# Altium PCB PCB_FVT_TESTER_2LAYERS.PcbDoc
Units mil, origin at the board's own origin, x right, y up, seen from the top; angles counter-clockwise.
Board outline 4400 x 2300 mil, 2 copper layers (Top Layer, Bottom Layer); 53 components, 42 nets, 165 pads, 1 vias.
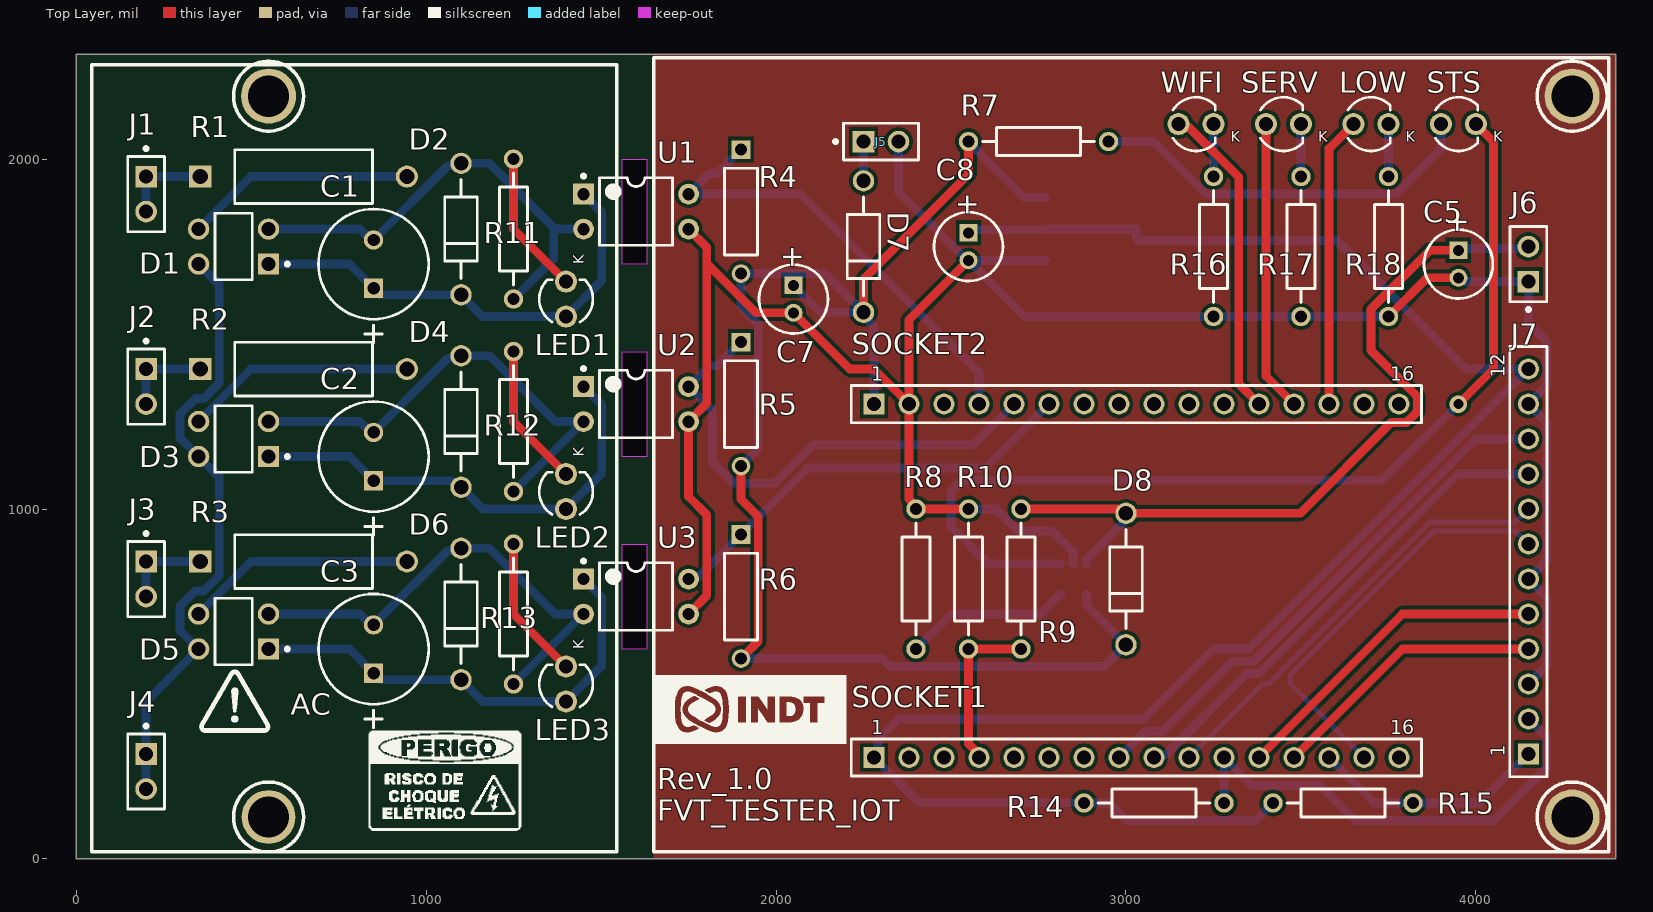
[diagram p0: Top Layer view]
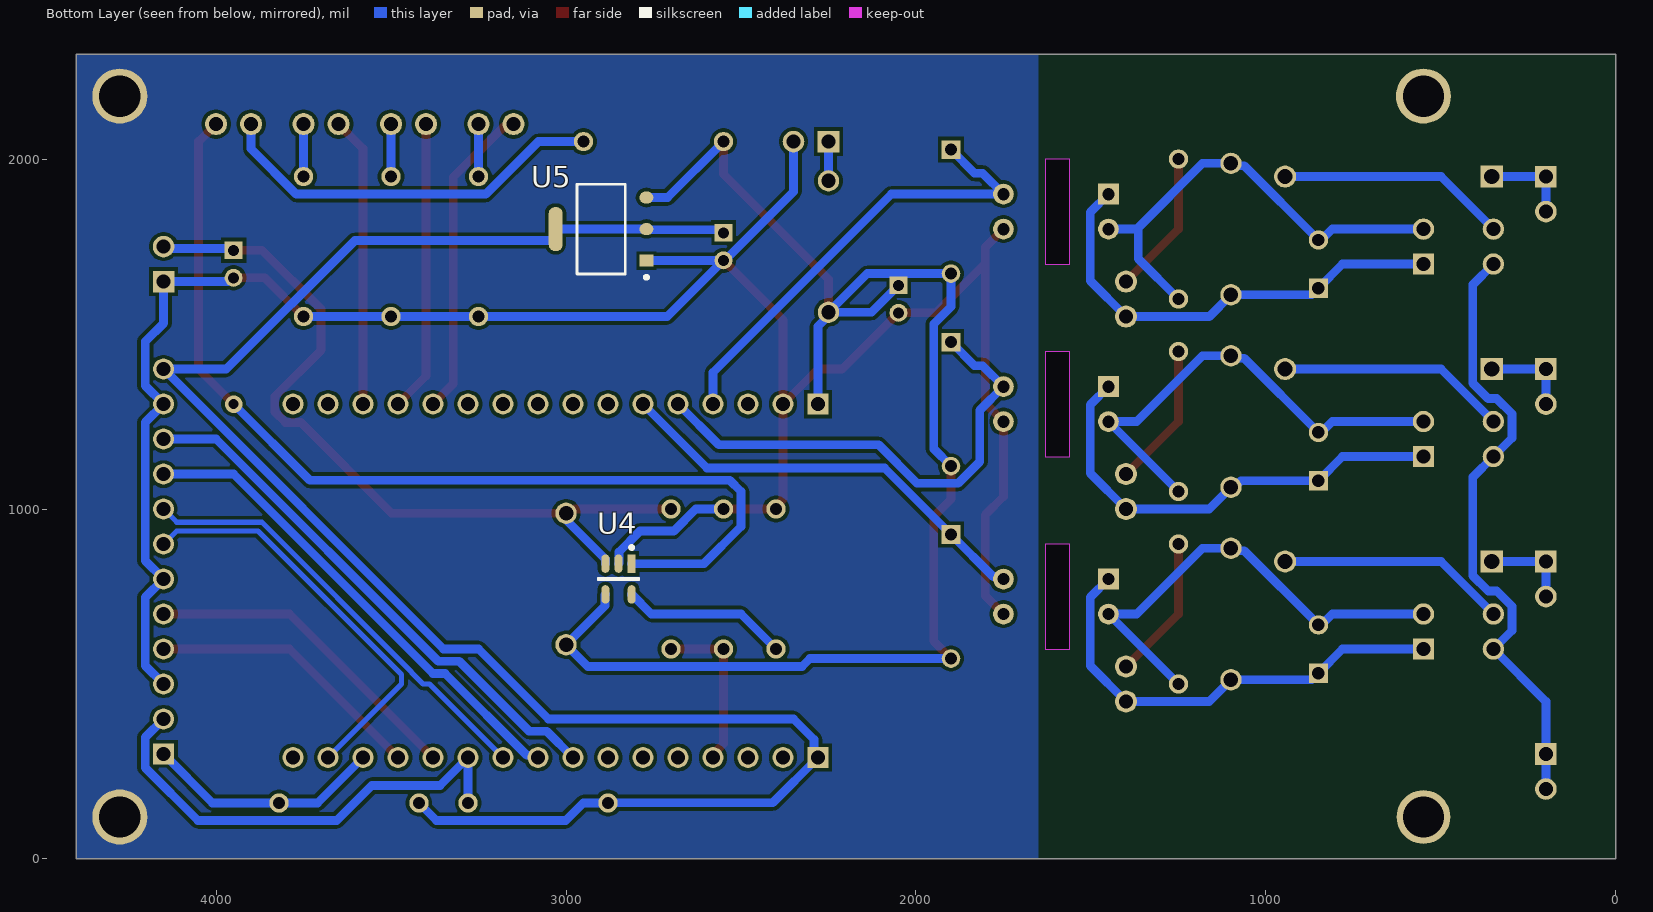
[diagram p1: Bottom Layer view, seen from below]

## Layer stack, top to bottom
Top Solder: solder mask 0.4, Solder Resist, Dk 3.5
Top Layer: signal copper 1.4
Dielectric 1: dielectric 12.6, FR-4, Dk 4.8
Bottom Layer: signal copper 1.4
Bottom Solder: solder mask 0.4, Solder Resist, Dk 3.5

## Board outline
0,0 0,2300 4400,2300 4400,0
cut-out: 1560,600 1560,900 1630,900 1630,600
cut-out: 1560,1150 1560,1450 1630,1450 1630,1150
cut-out: 1560,1700 1560,2000 1630,2000 1630,1700

## Design rules (kind name [scope] priority, off if disabled: settings)
Clearance [All] p1: gap=10 ignorepadtopadclearanceinfootprint=TRUE except(0: Text-Text; 6: Poly-Text Region-Text; 7: Arc-Text THPad-Text)
DiffPairsRouting [All] p1: maxlimit=10 minlimit=10 mostfreqgap=10 toplayer_minwidth=15 toplayer_maxwidth=15 toplayer_prefwidth=15 bottomlayer_minwidth=15 bottomlayer_maxwidth=15 bottomlayer_prefwidth=15 maxuncoupledlength=500
HoleSize [All] p1: absolutevalues=TRUE maxlimit=157.48 minlimit=0.98 maxpercent=80.000 minpercent=20.000
PolygonConnect [All] p1: connectstyle=Relief reliefconductorwidth=10 reliefentries=4 polygonreliefangle="90 Angle" airgapwidth=10
RoutingVias [All] p1: holewidth=28 width=50 viastyle="Through Hole" minholewidth=28 minwidth=50 maxholewidth=28 maxwidth=50
SilkToSilkClearance SilkToSilkClearance_noRules [All] p1: silktosilkclearance=0
SilkToSilkClearance [All] p2: silktosilkclearance=10
SilkToSolderMaskClearance SilkToSolderMaskClearance_INDT [IsPad] p1: minsilkscreentomaskgap=4 clearancetoexposedcopper=TRUE
SilkToSolderMaskClearance [IsPad] p2: minsilkscreentomaskgap=10 clearancetoexposedcopper=TRUE
SolderMaskExpansion [All] p1: expansion=4
UnRoutedNet [All] p1: checkbadconnections=TRUE
Width [All] p1: maxlimit=35 minlimit=15 preferedwidth=25 minimp=50.000000 maximp=50.000000 favimp=50.000000
25 further rules are at their usual default settings.

## Classes and differential pairs
component class soqueteESP32: J7 LOW R14 R15 R16 R17 R18 SERV SOCKET1 WIFI
component class "Modulo de isolaзгo AC": C1 C2 C3 D1 D2 D3 D4 D5 D6 J1 J2 J3 J4 LED1 LED2 LED3 R1 R2 R3 R4 R5 R6 R11 R12 R13 U1 U2 U3
component class AdaptadorBateria: C5 C7 C8 D7 D8 J5 J6 R7 R8 R9 R10 STS U4 U5
differential pair NET: +NET_P -NET_N

## Components (designator, comment, footprint, x,y, rotation, side; value= is the part's Value field where it differs from the comment)
C1 "ECA1HM101" CAPPR65-350-1150X800X1250 850,1700 r90 top
C2 "ECA1HM101" CAPPR65-350-1150X800X1250 850,1150 r90 top
C3 "ECA1HM101" CAPPR65-350-1150X800X1250 850,600 r90 top
C5 "ECA1HM220" CAPPR55-200-1100X500X1200 3950,1700 r270 top
C7 "ECA1HM220" CAPPR55-200-1100X500X1200 2050,1600 r270 top
C8 "ECA1HM220" CAPPR55-200-1100X500X1200 2550,1750 r270 top
D1 "MB6M-E3/45" FP-MB6M-E3-45-MFG 450,1750 r180 top
D2 "1N5919BG" ONSC-AXIAL_LEAD-2-59-10_P 1100,1800 r90 top
D3 "MB6M-E3/45" FP-MB6M-E3-45-MFG 450,1200 r180 top
D4 "1N5919BG" ONSC-AXIAL_LEAD-2-59-10_P 1100,1250 r90 top
D5 "MB6M-E3/45" FP-MB6M-E3-45-MFG 450,650 r180 top
D6 "1N5919BG" ONSC-AXIAL_LEAD-2-59-10_P 1100,700 r90 top
D7 "1N5819RLG" ONSC-AXIAL_LEAD-2-59-10_P 2250,1750 r90 top
D8 "1N5819RLG" ONSC-AXIAL_LEAD-2-59-10_P 3000,800 r90 top
J1 "TSW-102-07-G-S" FP-TSW-102-07-G-S-MFG 200,1900 r270 top
J2 "TSW-102-07-G-S" FP-TSW-102-07-G-S-MFG 200,1350 r270 top
J3 "TSW-102-07-G-S" FP-TSW-102-07-G-S-MFG 200,800 r270 top
J4 "TSW-102-07-G-S" FP-TSW-102-07-G-S-MFG 200,250 r270 top
J5 "TSW-102-07-G-S" FP-TSW-102-07-G-S-MFG 2300,2050 r0 top
J6 "TSW-102-07-G-S" FP-TSW-102-07-G-S-MFG 4150,1700 r90 top
J7 "61301211821" 61301211821 4150,850 r90 top (schematic designator J?)
LED1 "151031VS06000" "Type 3mm" 1400,1600 r90 top
LED2 "151031VS06000" "Type 3mm" 1400,1050 r90 top
LED3 "151031VS06000" "Type 3mm" 1400,500 r90 top
LOW "151031VS06000" "Type 3mm" 3700,2100 r0 top
R1 "PR02000206202JA100" VISH-A1-2_V2 650,1950 r0 top
R2 "PR02000206202JA100" VISH-A1-2_V2 650,1400 r0 top
R3 "PR02000206202JA100" VISH-A1-2_V2 650,850 r0 top
R4 "MFR-25FBF52-47K5" RESA60-630X240 1900,1850 r270 top
R5 "MFR-25FBF52-47K5" RESA60-630X240 1900,1300 r270 top
R6 "MFR-25FBF52-47K5" RESA60-630X240 1900,750 r270 top
R7 "Res2" AXIAL-0.4 2750,2050 r180 top value=1K
R8 "Res2" AXIAL-0.4 2400,800 r270 top value=2K
R9 "Res2" AXIAL-0.4 2700,800 r270 top value=2K
R10 "Res2" AXIAL-0.4 2550,800 r90 top value=2K
R11 "Res2" AXIAL-0.4 1250,1800 r90 top value=2K
R12 "Res2" AXIAL-0.4 1250,1250 r90 top value=2K
R13 "Res2" AXIAL-0.4 1250,700 r90 top value=2K
R14 "Res2" AXIAL-0.4 3080,160 r180 top value=2K
R15 "Res2" AXIAL-0.4 3620,160 r180 top value=2K
R16 "Res2" AXIAL-0.4 3250,1750 r90 top value=2K
R17 "Res2" AXIAL-0.4 3500,1750 r90 top value=2K
R18 "Res2" AXIAL-0.4 3750,1750 r90 top value=2K
SERV "151031VS06000" "Type 3mm" 3450,2100 r0 top
SOCKET1 "61301611821" 61301611821 3030,290 r0 top (schematic designator socket1)
SOCKET2 "61301611821" 61301611821 3030,1300 r0 top (schematic designator socket2)
STS "151031VS06000" "Type 3mm" 3950,2100 r0 top
U1 "VO617A-3" VISH-DIP-4 1600,1850 r0 top
U2 "VO617A-3" VISH-DIP-4 1600,1300 r0 top
U3 "VO617A-3" VISH-DIP-4 1600,750 r0 top
U4 "MCP73831T-2ACI/OT" FP-C04-091-OT-IPC_B 2850,800 r270 bottom
U5 "AMS1117-3.3" FP-AMS1117-IPC_C 2900,1800 r0 bottom
WIFI "151031VS06000" "Type 3mm" 3200,2100 r0 top

## Footprints (in the part's own frame and the unit in brackets; to place one, negate y for a bottom-side part, rotate by r counter-clockwise, add the part's x,y. Pads: shape width x height; smd on the part's side, far side on the other; paste and mask are expansions set on the pad)
61301211821 [mm] "Socket Header, Pitch 2.54 mm, THT, Vertical, single row, 12p"
  rect 1.52x1.52 hole 1.02: 1(-13.97,0)
  round 1.52 hole 1.02: 2(-11.43,0) 3(-8.89,0) 4(-6.35,0) 5(-3.81,0) 6(-1.27,0) 7(1.27,0) 8(3.81,0) 9(6.35,0) 10(8.89,0) 11(11.43,0) 12(13.97,0)
  silkscreen extent -15.62,-1.35 15.62,1.35, body extent -15.49,-1.25 15.49,1.25, height 8.55
61301611821 [mm] "Socket Header, Pitch 2.54 mm, THT, Vertical, single row, 16p"
  rect 1.52x1.52 hole 1.02: 1(-19.05,0)
  round 1.52 hole 1.02: 2(-16.51,0) 3(-13.97,0) 4(-11.43,0) 5(-8.89,0) 6(-6.35,0) 7(-3.81,0) 8(-1.27,0) 9(1.27,0) 10(3.81,0) 11(6.35,0) 12(8.89,0) 13(11.43,0) 14(13.97,0) 15(16.51,0) 16(19.05,0)
  silkscreen extent -20.7,-1.35 20.7,1.35, body extent -20.57,-1.25 20.57,1.25, height 8.55
AXIAL-0.4 [mm] "Axial Device, Thru-Hole; 2 Leads; 0.4 in Pin Spacing"
  round 1.4 hole 0.85: 1(-5.08,0) 2(5.08,0)
  silkscreen extent -4.06,-1.02 4.06,1.02
CAPPR55-200-1100X500X1200 [mm] "THD, 2-Leads, Dia 5mm, Body Length 11mm"
  rect 1.3x1.3 hole 0.8: 1(-1,0)
  round 1.3 hole 0.8: 2(1,0)
  silkscreen extent -2.5,-2.5 2.5,2.5, body extent -2.5,-2.5 2.5,2.5, height 12
CAPPR65-350-1150X800X1250 [mm] "THD, 2-Leads, Dia 8mm, Body 11.5mm"
  rect 1.4x1.4 hole 0.9: 1(-1.75,0)
  round 1.4 hole 0.9: 2(1.75,0)
  silkscreen extent -5.71,-4 4,4, body extent -4,-4 4,4, height 12.5
FP-AMS1117-IPC_C [mm]
  rect 1.004x0.872 smd paste+0 mask+0: 1(-3.295,2.29)
  rrect100% 1.004x0.872 smd paste+0 mask+0: 2(-3.295,0) 3(-3.295,-2.29)
  rrect87% 1.004x3.182 smd paste+0 mask+0: 4(3.295,0)
  silkscreen extent -3.42,-3.25 1.75,3.62, body extent -3.53,-3.25 3.53,3.25, height 1.8
FP-C04-091-OT-IPC_B [mm]
  rect 1.338x0.578 smd paste+0 mask+0: 1(-1.116,0.95)
  rrect100% 1.338x0.578 smd paste+0 mask+0: 2(-1.116,0) 3(-1.116,-0.95) 4(1.116,-0.95) 5(1.116,0.95)
  silkscreen extent -2.41,-1.45 0.05,1.45
FP-MB6M-E3-45-MFG [mm]
  rect 1.55x1.55 hole 1 paste-1000 mask+0: 1(-2.54,1.27)
  round 1.55 hole 1 paste-1000 mask+0: 2(-2.54,-1.27) 3(2.54,-1.27) 4(2.54,1.27)
  silkscreen extent -4.03,-2.41 1.35,2.41, body extent -3.41,-2.51 3.41,2.51, height 0.25
FP-TSW-102-07-G-S-MFG [mm]
  rect 1.57x1.57 hole 1.02 paste-1000 mask+0: 1(-1.27,0)
  round 1.57 hole 1.02 paste-1000 mask+0: 2(1.27,0)
  silkscreen extent -3.42,-1.34 2.73,1.34, body extent -2.83,-1.44 2.83,1.44, height 0.25
ONSC-AXIAL_LEAD-2-59-10_P [mm] "AXIAL, 2-Leads, Diameter 2.35mm"
  round 1.55 hole 1.05: 1(-4.77,0) 2(4.77,0)
  silkscreen extent -3.6,-1.18 3.6,1.18
RESA60-630X240 [mm] "Axial Resistor, 2-Leads, Dia 2.4mm, Body Length 6.3mm"
  rect 1.35x1.35 hole 0.85: 1(-4.5,0)
  round 1.35 hole 0.85: 2(4.5,0)
  silkscreen extent -3.15,-1.2 3.15,1.2, body extent -3.15,-1.2 3.15,1.2, height 2.4
"Type 3mm" [mm] "THT, LED-3mm, 2pin- Body 4.15mm(max)"
  round 1.6 hole 1: 1(1.27,0) 2(-1.27,0)
  silkscreen extent -1.66,-1.95 1.4,1.95, body extent -1.93,-1.94 1.87,1.94, height 10.5
VISH-A1-2_V2 [mm] "Through Hole, 2-Leads, Dia 3.9mm, Body Length 10mm, Pin Spacing 15mm"
  rect 1.6x1.6 hole 1.1: 1(-7.5,0)
  round 1.6 hole 1.1: 2(7.5,0)
  silkscreen extent -5,-1.95 5,1.95, body extent -7.91,-1.95 7.92,1.95, height 3.88
VISH-DIP-4 [mm] "DIP, 4-Leads, Body 7x4.9mm, Pitch 2.54mm"
  rect 1.5x1.5 hole 0.9: 1(-3.81,1.27)
  round 1.5 hole 0.9: 2(-3.81,-1.27) 3(3.81,-1.27) 4(3.81,1.27)
  silkscreen extent -3.93,-2.45 2.65,2.69, body extent -3.95,-2.45 3.95,2.45, height 5.27

## Part data
C1 C2 C3: library part CMP-1665-00042-2, "Aluminum Electrolytic Capacitor, 100 uF, +/- 20%, 50 V, -40 to 85 degC, 2-Pin THD, RoHS, Bulk", Capacitance=100uF, Case/Package=Radial, Dielectric Material=Aluminium, Leakage Current=3uA, Manufacturer=Panasonic, Max Operating Temperature=85degC, Min Operating Temperature=-40degC, Package Description="2-Pin Radial Lead, Dia 8 mm, Height 12.5 mm", Package Quantity=200, Package Reference=CAPPR65-350-1150X800X1250, Ripple Current=250mA, Tolerance=20%, Voltage=50V, Datasheet URL=https://industrial.panasonic.com/cdbs/www-data/pdf/RDF0000/ABA0000C1218.pdf, Datasheet Version="Rev. 05, 10/2016", Diameter=8mm, Dissipation Factor=0.12%, Height=11.5mm, Height - Seated (Max)=0.492inch, Lead Diameter=0.6mm, Lead Free=LeadFree, Lead Pitch=3.5mm, Lead/Base Style=Straight, Length=11.5mm, Life (Hours)=2000Hour, Manufacturer URL=http://www.panasonic.com/, Mount=ThroughHole, Number of Pins=2, Packaging=Bulk, Polarity=Polar, Radiation Hardening=No, REACH SVHC=NoSVHC, Ripple Current (AC)=250mA, RoHSCompliant=true, Termination=Radial, Voltage Rating=50V, Voltage Rating (DC)=50V
C5 C7 C8: library part CMP-1665-00036-2, "Aluminum Electrolytic Capacitor, 22 uF, +/- 20%, 50 V, -40 to 85 degC, 2-Pin THD, RoHS, Bulk", Capacitance=22uF, Case/Package=Radial, Leakage Current=3uA, Manufacturer=Panasonic, Max Operating Temperature=85degC, Min Operating Temperature=-40degC, Package Description="2-Pin Radial Lead, Dia 5 mm, Height 12 mm", Package Quantity=200, Package Reference=CAPPR55-200-1100X500X1200, Ripple Current=100mA, Tolerance=20%, Voltage=50V, Datasheet URL=https://industrial.panasonic.com/cdbs/www-data/pdf/RDF0000/ABA0000C1218.pdf, Datasheet Version="Rev. 05, 10/2016", Diameter=5mm, Dissipation Factor=0.12%, Height=11mm, Height - Seated (Max)=0.472inch, Lead Diameter=0.5mm, Lead Pitch=2mm, Lead/Base Style=Straight, Length=11mm, Life (Hours)=2000Hour, Manufacturer URL=http://www.panasonic.com/, Mount=ThroughHole, Packaging=Bulk, Radiation Hardening=No, REACH SVHC=NoSVHC, Ripple Current (AC)=100mA, RoHSCompliant=true, Termination=Radial, Voltage Rating=50V, Voltage Rating (DC)=50V
D1 D3 D5: library part CMP-02540-000050-1, "BRIDGE RECT 1P 600V 500MA MBM", Case/Package=DIP, Forward Current=800mA, Forward Voltage=1V, Max Operating Temperature=150°C, Max Repetitive Reverse Voltage (Vrrm)=600V, Max Reverse Leakage Current=5uA, Max Surge Current=35A, Min Operating Temperature=-55°C, Package Quantity=100, Element Configuration=Single, Height=2.7mm, Length=4.83mm, Mount="Surface Mount", Number of Elements=1, Number of Pins=4, Packaging=Rail/Tube, Peak Non-Repetitive Surge Current=35A, Peak Reverse Current=5uA, Radiation Hardening=No, Reverse Recovery Time=150ns, Width=4.1mm
D2 D4 D6: library part CMP-1060-00030-1, "3 W Zener Voltage Regulator, 2-Pin Axial_Lead, Pb-Free, Bulk Box", Manufacturer="On Semiconductor", ComponentLink1Description="Manufacturer URL", ComponentLink1URL=http://www.onsemi.com/, ComponentLink2Description=Datasheet, ComponentLink2URL=http://www.onsemi.cn/pub_link/Collateral/1N5913B-D.PDF, ComponentLink3Description="Package Specification", ComponentLink3URL=http://www.onsemi.cn/pub_link/Collateral/59-10.PDF, DatasheetVersion="Rev. 5", Mounting Technology="Through Hole", PackageDescription="2-Pin, Axial Lead, Diameter 2.35 mm", PackageReference=AXIAL_LEAD-2-59-10, PackageVersion="Rev. U, 02/2005", Packing="Bulk Box", PartNumber=1N5919BG, RoHS=Pb-Free, VZ Typ (V)=5.6
D7 D8: library part CMP-1055-00037-1, "Rectifier, 2-Pin Axial_Lead, Pb-Free, Tape and Reel", Manufacturer="On Semiconductor", ComponentLink1Description="Manufacturer URL", ComponentLink1URL=http://www.onsemi.com/, ComponentLink2Description=Datasheet, ComponentLink2URL=http://www.onsemi.cn/pub_link/Collateral/1N5817-D.PDF, ComponentLink3Description="Package Specification", ComponentLink3URL=http://www.onsemi.cn/pub_link/Collateral/59-10.PDF, Configuration=Single, DatasheetVersion="Rev. 10", IFSM Max (A)=25, Mounting Technology="Through Hole", PackageDescription="2-Pin, Axial Lead, Diameter 2.35 mm", PackageReference=AXIAL_LEAD-2-59-10, PackageVersion="Rev. U, 02/2005", Packing="Tape and Reel", PartNumber=1N5819RLG, RoHS=TRUE
J1 J2 J3 J4 J5 J6: library part CMP-02766-000084-1, "CONN HEADER VERT 2POS 2.54MM", Current Rating=6.3A, Manufacturer=Samtec, Temperature="-55°C to +125°C", Temperature Range High=+125°C, Temperature Range Low=-55°C, Voltage Rating=550V, Automotive=No, Category=Conn, ComponentLink2Description=Datasheet, ComponentLink2URL=http://suddendocs.samtec.com/catalog_english/tsw_th.pdf, Conn Gender=Male, Conn Orientation=Straight, Contact Material=Gold,Nickel, Device Class L1=Connectors, Device Class L2="Headers and Wire Housings", Device Class L3=unset, Digikey Description="CONN HEADER VERT 2POS 2.54MM", Footprint Url=http://suddendocs.samtec.com/prints/tsw-xxx-xx-x-x-xx-xxx-footprint.pdf, Height=8.71mm, Lead Free=Yes, Manufacturer Part Number=TSW-102-07-G-S, Mouser Description="Conn Unshrouded Header HDR 2 POS 2.54mm Solder ST Thru-Hole Automotive Bulk", Number Of Contacts=2, Number Of Rows=1, Octopart=https://octopart.com/tsw-102-07-g-s-samtec-272197, Package=TSW-102-07-G-S, Pitch=2.54mm, RoHS=TRUE
J7: library part CMP-1502-01337-1, "THT Vertical Socket Header WR-PHD, Pitch 2.54 mm, Single Row, 12 pins", Contact Resistance=20mOhm, Manufacturer="Wurth Elektronik", Operating Temperature=-40to125degC, Rated Current=3A, Withstanding Voltage=500VAC, Working Voltage=250VAC, Datasheet URL=https://katalog.we-online.de/em/datasheet/6130xx11821.pdf, Gender=Female, Manufacturer URL=http://www.we-online.de, Mounting Technology=THT, Orientation=Vertical, Package Reference=61301211821, Packaging=Tray, Part Number=61301211821, Pin Number=12, Pitch=2.54mm, Publisher=WurthElektronik, Row Number=Single
LED1 LED2 LED3 LOW SERV STS WIFI: library part CMP-1488-00004-1, "THT LED round mono-color color lens, WL-TMRC , Bright Green", Emitting color="Bright Green", Manufacturer="Wuerth Elektronik", ComponentLink1Description="Manufacturer URL", ComponentLink1URL=http://www.we-online.com, ComponentLink2Description=Datasheet, ComponentLink2URL=http://katalog.we-online.de/pbs/datasheet/7448042001.pdfhttp://katalog.we-online.de/pbs/datasheet/7448042001.pdfhttp://katalog.we-online.de/pbs/datasheet/7448042001.pdfhttp://katalog.we-online.de/pbs/datasheet/151031VS06000.pdf, PackageReference="Type 3mm", PartNumber=151031VS06000
R1 R2 R3: library part CMP-1240-00001-1, "Power Metal Film Leaded Resistor, 62 KOhm +/-5%, 2 W, 2-Pin THD, RoHS, Ammo Pack", Manufacturer="Vishay Semiconductor", Power="2 W", Resistance="62 KOhm", Temperature Coefficient="+/-250 ppm/degC", Tolerance=+/-5%, ComponentLink1Description="Manufacturer URL", ComponentLink1URL=http://www.vishay.com/, ComponentLink2Description=Datasheet, ComponentLink2URL=http://www.vishay.com/docs/28729/28729.pdf, ComponentLink3Description="Package Specification", ComponentLink3URL=http://www.vishay.com/docs/28729/28729.pdf, DatasheetVersion=Jun-13, Mounting Technology="Through Hole", PackageDescription="2-Pin Axial Lead, Body 10 x 3.9 mm", Packing="Ammo Pack", PartNumber=PR02000206202JA100, RoHS=TRUE
R4 R5 R6: library part CMP-1659-00063-1, "Axial Resistor, 47.5 KOhm, +/- 1%, 0.25 W, -55 to 155 degC, 2-Pin THD, RoHS, Bulk", Case Code (Metric)=2520, Case\Package=1008, Current Rating="1.3 A", Max Operating Temperature="125 degC", Min Operating Temperature="-55 degC", Package Quantity=3000, Tolerance=20%, ComponentLink1Description="Manufacturer URL", ComponentLink1URL=http://www.yageo.com/, ComponentLink2Description=Datasheet, ComponentLink2URL=http://www.yageo.com/documents/recent/Yageo%20LR_MFR_2013.pdf, DatasheetVersion=Apr-13, Height="1.2 mm", Length="2.5 mm", Mount="Surface Mount", PackageDescription="2-Pin Axial Lead, Dia 2.4 mm, Body Length 6.3 mm", PackageReference=MFR-25, Packaging="Tape and Reel", Radiation Hardening=No, RoHSCompliant=true, Shielding=Shielded, Width="2 mm"
R7 R8 R9 R10 R11 R12 R13 R14 R15 R16 R17 R18: "Resistor", LatestRevisionDate=17-Jul-2002, LatestRevisionNote="Re-released for DXP Platform.", PackageDescription="Axial Device, Thru-Hole; 2 Leads; 0.4 in Pin Spacing", PackageReference=AXIAL-0.4, Published=8-Jun-2000, Publisher="Altium Limited"
SOCKET1 SOCKET2: library part CMP-1502-01343-1, "THT Vertical Socket Header WR-PHD, Pitch 2.54 mm, Single Row, 16 pins", Contact Resistance=20mOhm, Manufacturer="Wurth Elektronik", Operating Temperature=-40to125degC, Rated Current=3A, Withstanding Voltage=500VAC, Working Voltage=250VAC, Datasheet URL=https://katalog.we-online.de/em/datasheet/6130xx11821.pdf, Gender=Female, Manufacturer URL=http://www.we-online.de, Mounting Technology=THT, Orientation=Vertical, Package Reference=61301611821, Packaging=Tray, Part Number=61301611821, Pin Number=16, Pitch=2.54mm, Publisher=WurthElektronik, Row Number=Single
U1 U2 U3: library part CMP-2000-07400-1, "Optocoupler, Phototransistor Output, High Reliability, 5300 VRMS, -55 to 110 degC, 4-Pin DIP, RoHS, Tape and Reel", Manufacturer=Vishay/Semiconductor, Maximum Collector Current=50mA, Maximum Collector Emitter Saturation Voltage=400mV, Maximum Collector Emitter Voltage=80V, Maximum Current Transfer Ratio @ Current=200%, Maximum Forward Voltage=1.65V, Maximum Input Current=60mA, Maximum Power Dissipation=150mW, Maximum Reverse Voltage=6V, Minimum Forward Voltage=1V, Minimum Isolation Voltage=5000Vrms, Operating Temperature=-55to110°C, Package=4PDIP, Package Description="4-Pin Double In-line Package, Body 4.58 x 6.5 mm, Pitch 2.54 mm", Package Reference=DIP-4, Typical Forward Voltage=1.35V, Category=TransistorandPhotovoltaicOutputPhotoCouplers, Datasheet URL=http://www.vishay.com/docs/83430/vo617a.pdf, Datasheet Version="Rev. 2.5, 08/2015", Input Type=DC, Manufacturer URL=http://www.vishay.com/, Mounting Technology=ThroughHole, Number of Channels per Chip=1, Output Type=DC, Packaging=Tape&Reel, Rad Hard=No
U4: library part CMP-0133-00143-2, "IC CONTROLLR LI-ION 4.2V SOT23-5", Case/Package=SOT-23, Drain to Source Resistance=350mR, Max Charge Current=500mA, Max Input Voltage=6V, Max Operating Temperature=85°C, Max Output Voltage=4.5V, Max Power Dissipation=1.54W, Min Operating Temperature=-40°C, Min Output Voltage=4.168V, Min Supply Voltage=3.75V, Output Voltage=4.2V, Voltage Rating=4.534V, Contact Plating=Tin, Height=0.051inch, Lead Free="Lead Free", Length=0.122inch, Max Supply Voltage=6V, Mount="Surface Mount", Number of Cells=1, Number of Channels=1, Number of Outputs=1, Number of Pins=5, Output Current=500mA, Packaging="Tape and Reel", Radiation Hardening=No, REACH SVHC="No SVHC", Termination=SMD/SMT, Weight=0.00709oz, Width=0.071inch
U5: library part CMP-209535-000001-1, "LDO Voltage Regulators 1A, 3.3V", Dropout Voltage=1.1V, Manufacturer="Advanced Monolithic Systems", Max Junction Temp=+125°C, Max Power Dissipation=1.2W, Max Supply Voltage=15V, Nominal Supply Current=5mA, Output Current=1A, Output Voltage=3.3V, Package=AMS1117, Temperature="-40°C to +125°C", Temperature Range Low=-40°C, Automotive=No, Category=IC, ComponentLink2Description=Datasheet, ComponentLink2URL=http://www.advanced-monolithic.com/pdf/ds1117.pdf, Device Class L1="Integrated Circuits (ICs)", Device Class L2="Power Management ICs", Device Class L3="Voltage Regulators - Linear", Height=1.8mm, Ipc Land Pattern Name=SOT229P700X180-4, Lead Free=Yes, Manufacturer Part Number=AMS1117-3.3, Number of Outputs=1, Octopart=https://octopart.com/ams1117-3.3-advanced+monolithic+systems-25899300, Output Type=Fixed, RoHS=TRUE, Standoff Height=0.64mm, Temperature Range High=+125°C

## Free pads (board coordinates)
  round 153.54 hole 118.11: 1(550,120)
  round 157.48 hole 118.11: 1(550,2180) 1(4275,120) 1(4275,2180)

## Via types
v1: diameter 50, hole 28, Top Layer to Bottom Layer, 1 vias

## Nets (pads, with @x,y where several pads share a name; then routed paths per layer and width w, separated by ;. In a path a pad name is that pad's centre, name@x,y a point inside that pad or via, vN(x,y) a via of type N, cw(c..) or ccw(c..) an arc to the next point about the centre after c; other vN are vias at no path point)
GND: C5.2 C7.2 C8.2 J5.2 J6.1 J7.3 J7.6 J7.11 R8.1 R10.2 R16.1 R17.1 R18.1 SOCKET2.2 U1.3 U2.3 U3.3 U4.2 U5.1 | length 6895
  Top Layer w25: U3.3 1802.03,752.03 1802.03,983.6 1750,1035.63 U2.3 1802.03,1302.03 1802.03,1701.4 ; U1.3 1802.03,1747.97 1802.03,1701.4 ; R10.2 R8.1 2400,1008.15 2380,1028.15 SOCKET2.2 ; C8.2 2380,1540.63 SOCKET2.2 ; R18.1 3860.63,1660.63 C5.2 ; 1802.03,1701.4 1942.8,1560.63 C7.2 2210.63,1400 2280,1400 SOCKET2.2
  Bottom Layer w25: J5.2 2350,1906.37 2545.74,1710.63 C8.2 C8.2@2550.39,1710.24 ; R10.2 2629.21,1000 2692.28,936.92 2789.16,936.92 2848.88,877.21 2848.88,845.07 U4.2 ; U5.1 2769.88,1710.24 C8.2@2550.39,1710.24 ; R18.1 R17.1 R16.1 2710.63,1550 C8.2@2550.39,1710.24 ; C5.2 3957.08,1660.63 3967.71,1650 J6.1 4150,1531.15 4202.42,1478.73 4202.42,1352.42 J7.11 4202.42,1247.58 4202.42,852.42 J7.6 4202.42,747.58 4202.42,552.42 J7.3
IO2: R9.2 R10.1 SOCKET1.4 | length 472.4
  Top Layer w25: SOCKET1.4 2580,299.43 2550,329.43 R10.1 R9.2
NET_N: J7.7 SOCKET1.15 | length 1189.8
  Bottom Layer w15: SOCKET1.15 3470,500 3470,527.5 3880,937.5 4112.5,937.5 J7.7
NET_P: J7.8 SOCKET1.10 | length 1265
  Bottom Layer w15: SOCKET1.10 3390,500 3408.71,500 3441.65,532.94 3441.65,534.51 3869.64,962.5 4112.5,962.5 J7.8
NetC1_1: C1.1 D1.1 D2.1 LED1.2 U1.1 | length 1326
  Bottom Layer w25: D1.1 781.1,1700 C1.1 868.9,1612.2 D2.1 1162.26,1549.94 1399.94,1549.94 LED1.2 1502.03,1652.03 1502.03,1847.97 U1.1
NetC1_2: C1.2 D1.2 D2.2 R11.1 U1.2 | length 1333.1
  Bottom Layer w25: D1.2 810.75,1800 841.85,1768.9 C1.2 1062.01,1980.9 1093.11,1980.9 D2.2 1181.37,1987.8 1365,1804.16 ; R11.1 1365,1715 1365,1804.16 ; U1.2 1369.16,1800 1365,1804.16
NetC2_1: C2.1 D3.1 D4.1 LED2.2 U2.1 | length 1326
  Bottom Layer w25: D3.1 781.1,1150 C2.1 1071.35,1081.1 1090.25,1062.2 D4.1 1162.26,999.94 1399.94,999.94 LED2.2 1502.03,1102.03 1502.03,1297.97 U2.1
NetC2_2: C2.2 D3.2 D4.2 R12.1 U2.2 | length 1364.2
  Bottom Layer w25: D3.2 810.75,1250 841.85,1218.9 C2.2 1062.01,1430.9 1093.11,1430.9 D4.2 1181.37,1437.8 1369.16,1250 U2.2 R12.1
NetC3_1: C3.1 D5.1 D6.1 LED3.2 U3.1 | length 1326
  Bottom Layer w25: D5.1 781.1,600 C3.1 868.9,512.2 D6.1 1162.26,449.94 1399.94,449.94 LED3.2 1502.03,552.03 1502.03,747.97 U3.1
NetC3_2: C3.2 D5.2 D6.2 R13.1 U3.2 | length 1364.2
  Bottom Layer w25: D5.2 810.75,700 841.85,668.9 C3.2 1062.01,880.9 1093.11,880.9 D6.2 1181.37,887.8 1369.16,700 U3.2 R13.1
NetC5_1: C5.1 D8.2 J6.2 R9.1 U4.3 | length 2319.9
  Top Layer w25: R9.1 2978.05,1000 2990.25,987.8 D8.2 3498.5,987.8 3758.29,1247.58 3801.71,1247.58 3832.42,1278.29 3832.42,1321.71 3699.94,1454.19 3699.94,1570.74 3868.58,1739.37 C5.1
  Bottom Layer w25: U4.3 2887.4,856.67 2993.11,962.37 2993.11,980.9 D8.2 ; C5.1 3955.31,1744.69 4144.69,1744.69 J6.2
NetD1_3: D1.3 R1.2 | length 657.4
  Bottom Layer w25: D1.3 500,1950 R1.2
NetD1_4: D1.4 D3.4 D5.4 J4.1 J4.2 | length 1776
  Bottom Layer w25: J4.2 J4.1 200,450 D5.4 296.99,653.01 296.99,721.96 340.6,765.57 365.11,765.57 408.72,809.18 408.72,1091.28 D3.4 296.99,1203.01 296.99,1271.96 340.6,1315.57 365.11,1315.57 408.72,1359.18 408.72,1641.28 D1.4
NetD3_3: D3.3 R2.2 | length 657.4
  Bottom Layer w25: D3.3 500,1400 R2.2
NetD5_3: D5.3 R3.2 | length 657.4
  Bottom Layer w25: D5.3 500,850 R3.2
NetD7_2: D7.2 J5.1 | length 112.2
  Bottom Layer w25: D7.2 J5.1
NetJ1_1: J1.1 J1.2 R1.1 | length 260.5
  Bottom Layer w25: J1.2 J1.1 R1.1 358.07,1950 R1.1@359.78,1951.71
NetJ2_1: J2.1 J2.2 R2.1 | length 254.7
  Bottom Layer w25: J2.2 J2.1 R2.1
NetJ3_1: J3.1 J3.2 R3.1 | length 254.7
  Bottom Layer w25: J3.2 J3.1 R3.1
NetJ?_1: J7.1 R15.1 SOCKET1.14 | length 681.8
  Bottom Layer w25: SOCKET1.14 3710,160 R15.1 4010,160 J7.1
NetJ?_2: J7.2 R14.1 SOCKET1.11 | length 1350.4
  Bottom Layer w25: R14.1 SOCKET1.11 3359.94,210.06 3554.99,210.06 3655.11,109.94 4051.6,109.94 4202.42,260.76 4202.42,347.58 J7.2
NetJ?_4: J7.4 SOCKET1.13 | length 798.4
  Top Layer w25: SOCKET1.13 3790,600 J7.4
NetJ?_5: J7.5 SOCKET1.12 | length 939.8
  Top Layer w25: SOCKET1.12 3790,700 J7.5
NetJ?_9: J7.9 SOCKET1.9 | length 1405.5
  Bottom Layer w25: SOCKET1.9 3086.67,296.67 3112.53,296.67 3345.87,530 3380,530 3950,1100 J7.9
NetJ?_10: J7.10 SOCKET1.8 | length 1546.9
  Bottom Layer w25: SOCKET1.8 3055,365 3105.5,365 3305.5,565 3365,565 4000,1200 J7.10
NetLED1_1: LED1.1 R11.2 | length 412.1
  Top Layer w25: R11.2 1250,1800 LED1.1
NetLED2_1: LED2.1 R12.2 | length 412.1
  Top Layer w25: R12.2 1250,1250 LED2.1
NetLED3_1: LED3.1 R13.2 | length 412.1
  Top Layer w25: R13.2 1250,700 LED3.1
NetLOW_1: LOW.1 R18.2 | length 150
  Bottom Layer w25: R18.2 LOW.1
NetLOW_2: LOW.2 SOCKET2.14 | length 829
  Top Layer w25: SOCKET2.14 3580,2030 LOW.2
NetR7_1: R7.1 STS.2 | length 1136.5
  Bottom Layer w25: R7.1 3079.21,2050 3229.26,1899.94 3770.74,1899.94 3900,2029.21 STS.2
NetR8_2: R8.2 U4.5 | length 477.2
  Bottom Layer w25: R8.2 2500,700 2756.54,700 U4.5
NetR16_2: R16.2 WIFI.1 | length 150
  Bottom Layer w25: R16.2 WIFI.1
NetR17_2: R17.2 SERV.1 | length 150
  Bottom Layer w25: R17.2 SERV.1
NetSERV_2: SERV.2 SOCKET2.13 | length 833.1
  Top Layer w25: SERV.2 3400,1380 SOCKET2.13
Netsocket2_12: SOCKET2.12 WIFI.2 | length 907.5
  Top Layer w25: WIFI.2 3157.27,2092.73 3178.06,2092.73 3322.03,1948.76 3322.03,1357.97 SOCKET2.12
NetSTS_1: STS.1 U4.1 | length 2872.3
  Top Layer w25: v1(3950,1300) 4050,1400 4050,2050 STS.1
  Bottom Layer w25: U4.1 2606.05,843.95 2500,950 2500,979.21 2499.94,979.26 2499.94,1050 2532.23,1082.29 3732.29,1082.29 v1(3950,1300)
sinal_CM: R6.1 SOCKET2.6 U3.4 | length 1237.1
  Bottom Layer w25: U3.4 1756.52,806.52 1779.35,806.52 R6.1 2090.12,1117.29 2597.29,1117.29 SOCKET2.6
sinal_FM: R4.1 SOCKET2.4 U1.4 | length 1333.9
  Bottom Layer w25: R4.1 1832.64,1959.8 1809.8,1959.8 U1.4 2070,1900 2580,1390 SOCKET2.4
sinal_VA: R5.1 SOCKET2.5 U2.4 | length 1426.7
  Bottom Layer w25: R5.1 1832.64,1409.8 1809.8,1409.8 U2.4 1818.09,1281.91 1818.09,1135.34 1879.67,1073.76 1997.1,1073.76 2106.88,1183.55 2563.55,1183.55 SOCKET2.5
VDD: C7.1 D7.1 D8.1 R4.2 R5.2 R6.2 R7.2 SOCKET2.1 U4.4 U5.3 | length 4308
  Top Layer w25: R6.2 1949.07,621.91 1949.07,978.71 1900,1027.78 R5.2 ; D7.1 2250,1656.9 2550,1956.9 R7.2
  Bottom Layer w25: R6.2 2302.73,572.83 2325.62,549.94 2937.74,549.94 D8.1 2888.52,723.68 2888.52,754.93 U4.4 ; R5.2 1949.07,1171.91 1949.07,1528.71 1900,1577.78 R4.2 2139.37,1672.83 D7.1 ; C7.1 2127.17,1562.2 D7.1 ; SOCKET2.1 2280,1522.46 2250,1552.46 D7.1 ; R7.2 2709.84,1890.16 U5.3
VDD3v3: C8.1 J7.12 R14.2 R15.2 SOCKET1.1 U5.2 U5.4 | length 5373.2
  Bottom Layer w25: C8.1 2558.84,1798.21 2768.49,1798.21 U5.2 U5.4 3029.72,1773.97 3036.64,1767.06 3603.74,1767.06 3970.79,1400 J7.12 3350,600 3250,600 3050,400 2350,400 2291.44,341.44 2291.44,301.44 SOCKET1.1 2409.55,160.45 R14.2@2879.55,160.45 ; R14.2 2950.79,160 3000.85,109.94 3369.94,109.94 R15.2
pads on no net: SOCKET1.2 SOCKET1.3 SOCKET1.5 SOCKET1.6 SOCKET1.7 SOCKET1.16 SOCKET2.3 SOCKET2.7 SOCKET2.8 SOCKET2.9 SOCKET2.10 SOCKET2.11 SOCKET2.15 SOCKET2.16

## Polygon pours and split planes (outlines as drawn)
no net on Top Layer "NONET_L01_P000" (solid, pour order 0): 4400,0 4400,2300 1650,2300 1650,0
no net on Bottom Layer "NONET_L02_P001" (solid, pour order 1): 1650,2300 1650,0 4400,0 4400,2300
no net on Top Overlay (solid): 4640,2210

## Silkscreen, mask and mechanical layers (free items; w line width, h text height)
Top Overlay:
  drawing of 47 lines, arcs and shapes, not listed
  text "AC" at 613.43,411.96 h60
  text "Rev_1.0  / FVT_TESTER_IOT" at 1660,110 h60

## Text inside footprints (layer, text, board x,y; h text height)
C5: Top Overlay "+" at 3920.98,1853.86 h59.06 r270
C7: Top Overlay "+" at 2020.98,1753.86 h59.06 r270
C8: Top Overlay "+" at 2520.98,1903.86 h59.06 r270
J7: Top Overlay "12" at 4083.07,1375.2 h40 r90; Top Overlay "1" at 4083.07,292.52 h40 r90
LED1: Top Overlay "K" at 1450,1700 h30 r90; Mechanical 15 "K" at 1450,1700 h30 r90
LED2: Top Overlay "K" at 1450,1150 h30 r90; Mechanical 15 "K" at 1450,1150 h30 r90
LED3: Top Overlay "K" at 1450,600 h30 r90; Mechanical 15 "K" at 1450,600 h30 r90
LOW: Top Overlay "K" at 3800,2050 h30; Mechanical 15 "K" at 3800,2050 h30
SERV: Top Overlay "K" at 3550,2050 h30; Mechanical 15 "K" at 3550,2050 h30
SOCKET1: Top Overlay "1" at 2272.52,356.93 h40; Top Overlay "16" at 3755.2,356.93 h40
SOCKET2: Top Overlay "1" at 2272.52,1366.93 h40; Top Overlay "16" at 3755.2,1366.93 h40
STS: Top Overlay "K" at 4050,2050 h30; Mechanical 15 "K" at 4050,2050 h30
WIFI: Top Overlay "K" at 3300,2050 h30; Mechanical 15 "K" at 3300,2050 h30